# Allegro board BODY.brd
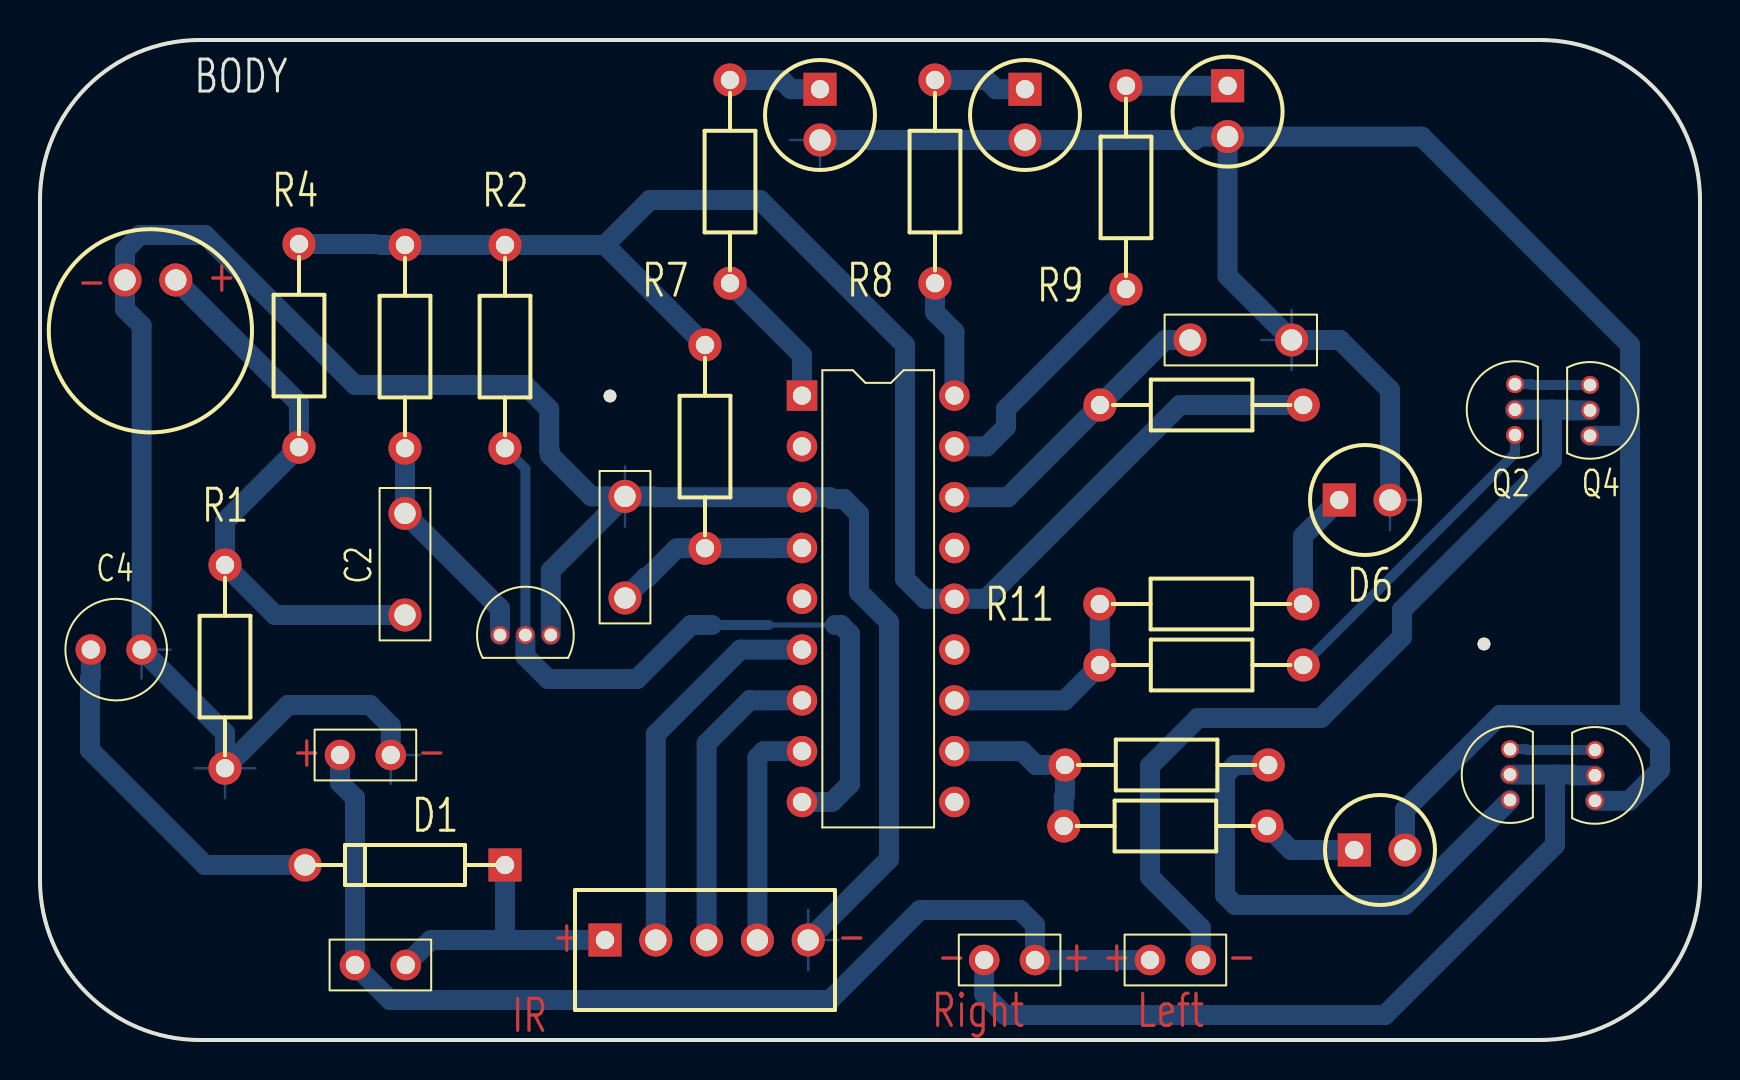
[diagram p0: board, top side]
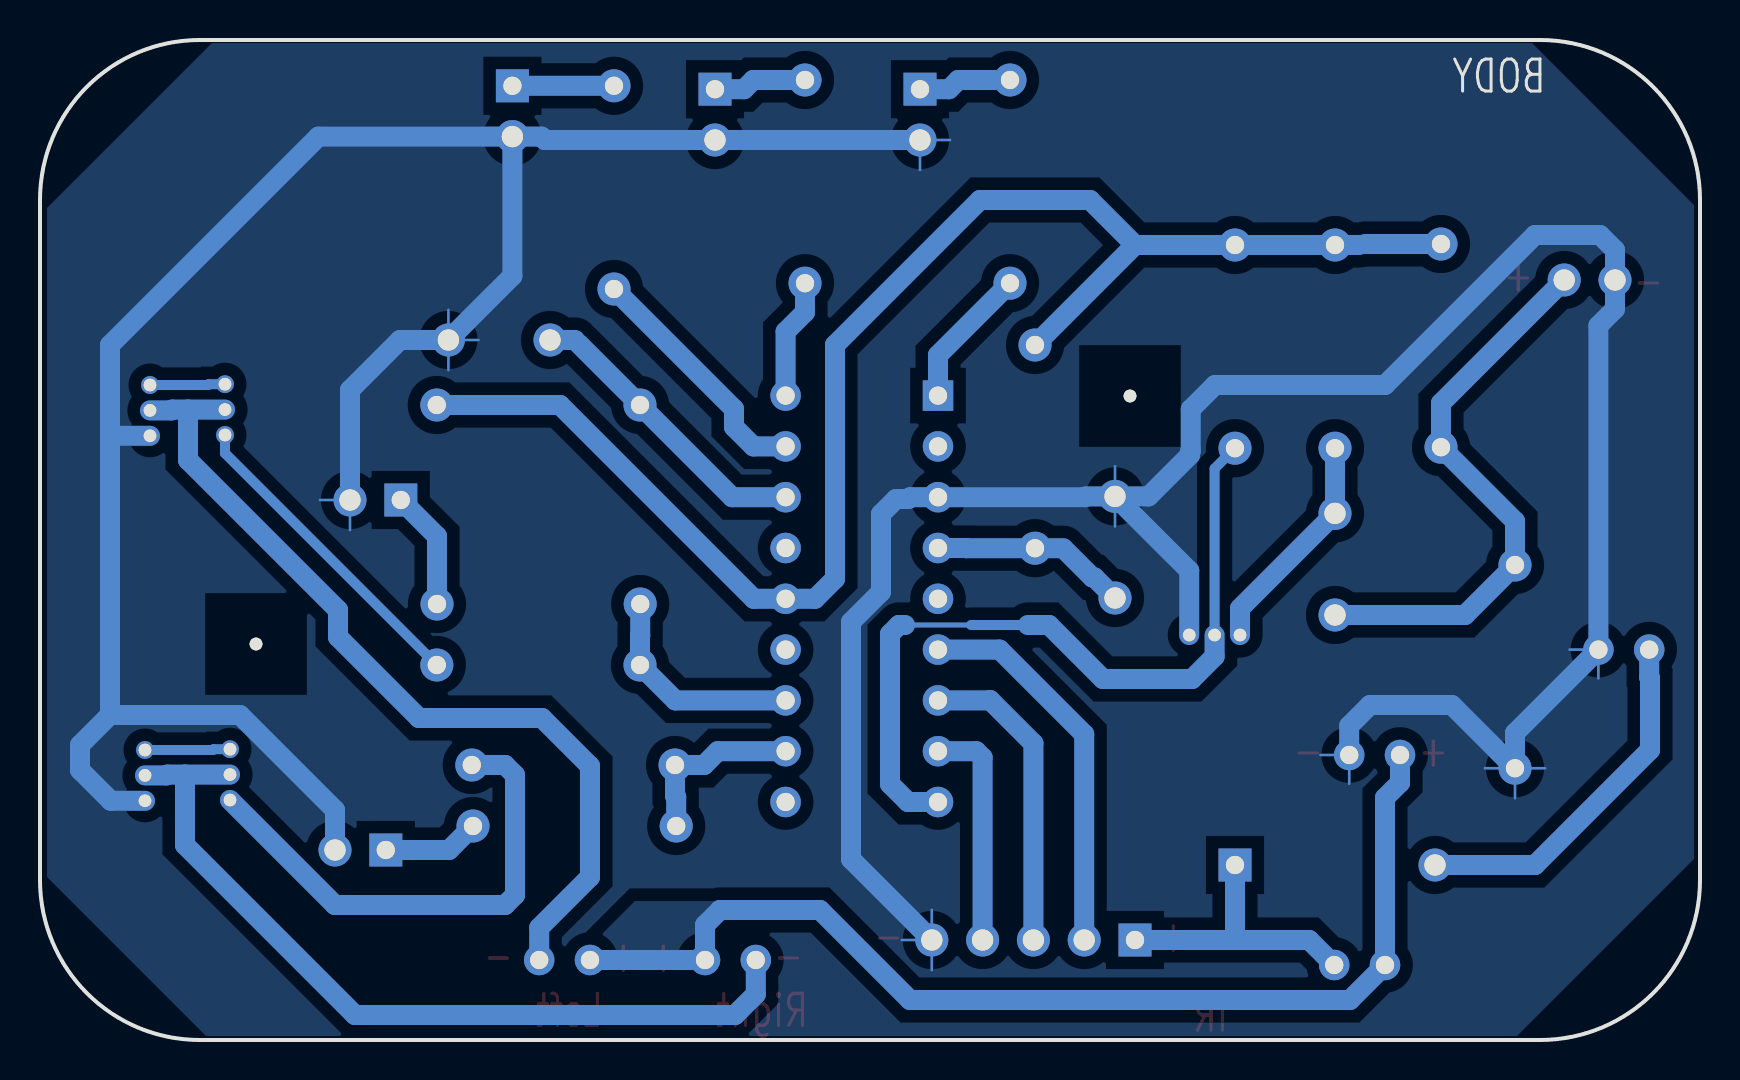
[diagram p1: board, bottom side, seen from below]

Outline 83 x 50 mm; copper layers: TOP, BOTTOM. Coordinates in mm from the lower left corner of the outline.
Outline path: 0,42 0,8 arc(2.34,2.34) 8,0 75,0 arc(80.66,2.34) 83,8 83,42 arc(80.66,47.66) 75,50 8,50 arc(2.34,47.66) 0,42

## Placement (name value [footprint] x y rotation side)
BATTERY  BATTERY  [JUMPER2]  15 14.25 0 top
C1  104  [CAPCK06]  29.25 22.1 0 top
C2  104  [CAPCK06]  18.25 21.25 0 top
C3  11pF  [CAPCK06]  57.5 35 270 top
C4  100uF  [CAP196]  2.54 19.52 270 top
D1  1N4004  [DIODE]  13.25 8.75 0 top
D2  RED  [LEDKA]  49.25 45 90 top
D3  RED  [LEDKA]  59.38 45.17 90 top
D4  RED  [LEDKA]  39 45 90 top
D5  GREEN  [LEDKA]  68.25 9.5 180 top
D6  GREEN  [LEDKA]  67.5 27 180 top
J1  5_pins_180_degrees  [HEADER_5]  28.25 5 0 top
J2  Right motor  [JUMPER2]  55.5 4 0 top
J3  Left motor  [JUMPER2]  49.75 4 180 top
MK1  -  [MICROPHONE]  4.25 38 0 top
NOREF  -  [unnamed]  28.5 32.2 0 top
NOREF#2  -  [unnamed]  72.2 19.8 0 top
Q1  C1815  [TO92]  23 20.25 90 top
Q2  C1815  [TO92]  73.75 30.25 180 top
Q3  C1815  [TO92]  73.5 12 180 top
Q4  8050  [TO92]  77.5 32.75 0 top
Q5  8050  [TO92]  77.75 14.5 0 top
R1  560R  [ODPOR]  9.25 23.75 270 top
R2  10k  [ODPOR]  23.25 39.75 270 top
R3  3.3M  [ODPOR]  18.25 39.75 270 top
R4  56k  [ODPOR]  12.95 39.8 270 top
R5  220R  [ODPOR]  53 18.75 0 top
R6  220R  [ODPOR]  51.25 13.75 0 top
R7  330R  [ODPOR]  34.5 48 270 top
R8  330R  [ODPOR]  44.75 48 270 top
R9  330R  [ODPOR]  54.3 47.71 270 top
R10  3.3k  [ODPOR]  53 31.75 0 top
R11  220R  [ODPOR]  63.15 21.8 180 top
R12  220R  [ODPOR]  61.35 10.7 180 top
R13  100k  [ODPOR]  33.25 34.75 270 top
SW  POWER SW  [JUMPER2]  15.75 3.75 0 top
U1  EM78P156EP  [DIP18_3]  38.1 32.22 0 top

## Library data of the parts
BATTERY = BATTERY
C1-C3 = C
C4 = CAP POL
D1 = DIODE
D2-D6 = LED
J1 = CONN PCB 5-R
J2 J3 = Motor
MK1 = MICROPHONE
Q1-Q5 = 1R1001
R1-R13 = R
SW = SW_PB_SPST
U1 = EM78P156EP_0

## Footprints (pads in the part's own frame, mm; a bottom-side part is the same pattern mirrored in y, then rotated)
CAP196
  round 1.524 hole 0.914: 1(0,0) 2(0,2.54)
CAPCK06
  round 1.651 hole 1.067: 1(0,0) 2(0,5.08)
DIODE
  round 1.651 hole 1.067: 1(0,0)
  rect 1.651x1.651 hole 0.914: 2(10,0)
DIP18_3
  rect 1.524x1.524 hole 0.914: 1(0,0)
  round 1.524 hole 0.914: 2(0,-2.54) 3(0,-5.08) 4(0,-7.62) 5(0,-10.16) 6(0,-12.7) 7(0,-15.24) 8(0,-17.78) 9(0,-20.32) 10(7.62,-20.32) 11(7.62,-17.78) 12(7.62,-15.24) 13(7.62,-12.7) 14(7.62,-10.16) 15(7.62,-7.62) 16(7.62,-5.08) 17(7.62,-2.54) 18(7.62,0)
HEADER_5
  rect 1.651x1.651 hole 0.914: 1(0,0)
  round 1.651 hole 1.067: 2(2.54,0) 3(5.08,0) 4(7.62,0) 5(10.16,0)
JUMPER2
  round 1.524 hole 0.914: 1(0,0) 2(2.54,0)
LEDKA
  round 1.651 hole 1.067: 1(0,0)
  rect 1.651x1.651 hole 0.914: 2(2.54,0)
MICROPHONE
  round 1.651 hole 1.067: 1(0,0) 2(2.54,0)
ODPOR
  round 1.651 hole 0.914: 1(0,0) 2(10.16,0)
TO92
  round 0.889 hole 0.635: 1(0,0) 2(0,-1.27) 3(0,-2.54)
unnamed
  round 0.635 hole 3.175 unplated: (0,0)

## Nets
GND: BATTERY.2(-) C1.2 C3.2 C4.2 D2.1(CATHODE) D3.1(CATHODE) D4.1(CATHODE) D5.1(CATHODE) D6.1(CATHODE) J1.5 MK1.1 Q1.3(E) Q4.3(E) Q5.3(E) R1.2 U1.3(TCC)
VCC: R2.1 R3.1 R4.1 R10.2 R13.1 U1.14(VCC)
N01126: C3.1 R10.1 U1.16(OSCI)
N01130: C1.1 R13.2 U1.4(R\E\S\E\T\)
N01134: D4.2(ANODE) R7.1
N01138: D2.2(ANODE) R8.1
N01142: D3.2(ANODE) R9.1
N01146: D1.2(A) J1.1 SW.2
N01150: BATTERY.1(+) J2.1(+) J3.1(+) SW.1
N01157: C4.1 D1.1(K)
N01166: C2.1 MK1.2 R1.1 R4.2
N01189: C2.2 Q1.1(B) R3.2
N01198: Q1.2(C) R2.2 U1.9(P63)
N01250: Q2.1(B) R5.2
N01254: D5.2(ANODE) R12.1
N01267: Q3.1(B) R6.2
N01271: Q3.3(E) Q5.1(B)
N01286: J3.2(-) Q3.2(C) Q5.2(C)
N01298: Q2.3(E) Q4.1(B)
N01305: J2.2(-) Q2.2(C) Q4.2(C)
N01562: R6.1 R12.2 U1.11(P65)
N01583: R5.1 R11.2 U1.12(P66)
N002050: D6.2(ANODE) R11.1
N06854: R9.2 U1.17(P50)
N06861: R8.2 U1.18(P51)
N06873: R7.2 U1.1(P52)
N06952: J1.2 U1.6(P60,I\N\T\)
N06956: J1.3 U1.7(P61)
N06960: J1.4 U1.8(P62)

Pads without a net: U1 2 5 10 13 15

## Routing (per net, layer and track width the routed paths; a pad name or vN(x,y) marks a point on that pad's centre or on a via; arc(x,y) is an arc through that point)
GND: length 254.8
  BOTTOM w0.127: 61.07,35 C3.2 ; C3.2 62.58,36.51 ; C3.2 62.58,33.49 ; 29.25,25.67 C1.2 29.25,28.69 ; 9.25,12.08 R1.2 ; R1.2 10.76,13.59 ; R1.2 7.74,13.59 ; 6.52,19.52 C4.2 5.08,18.08 ; 67.5,25.49 D6.1 69.01,27 ; 38.41,3.49 J1.5 ; J1.5 39.92,5 ; J1.5 38.41,6.51 ; 17.54,12.81 BATTERY.2 18.98,14.25 ; 37.49,45 D4.1 39,43.49
  BOTTOM w1: J1.5 42.45,9.04 42.45,20.9 40.95,22.4 40.95,26.3 40.2,27.05 39.58,27.05 39.49,27.14 U1.3 30.74,27.14 30.7,27.18 C1.2 ; Q1.3 25.54,23.47 C1.2 ; D3.1 69.08,45.17 79.5,34.75 79.5,30.25 ; D3.1 59.38,38.2 C3.2 65,35 67.5,32.5 D6.1 ; D3.1 57.93,45.17 57.76,45 D2.1 D4.1 ; 79.5,16.25 73,16.25 68.25,11.5 D5.1 ; 79.5,16.25 81,14.75 81,13.5 79.46,11.96 Q5.3 ; 79.5,16.25 79.5,30.25 ; 79.5,30.25 79.46,30.21 Q4.3 ; C1.2 27.57,27.18 25.5,29.25 25.5,29.41 25.46,29.45 25.46,31.54 24.25,32.75 15.75,32.75 8.25,40.25 5,40.25 4.25,39.5 MK1.1 4.25,36.55 5.08,35.72 C4.2 9.25,15.35 R1.2 12.41,16.75 16.5,16.75 17.54,15.71 BATTERY.2
VCC: length 77.4
  BOTTOM w0.5: 16.75,39.8 17,39.8 17.05,39.75
  BOTTOM w1: 17.05,39.75 R3.1 R2.1 28.25,39.75 ; 28.25,39.75 R13.1 ; 28.25,39.75 30.5,42 36,42 43.25,34.75 43.25,23.06 44.25,22.06 U1.14 47.31,22.06 57,31.75 R10.2 ; R4.1 16.75,39.8
N01126: length 15
  BOTTOM w0.5: 56.25,35 56.05,34.8
  BOTTOM w1: C3.1 56.25,35 ; U1.16 48.39,27.14 R10.1 56.05,34.8
N01130: length 9.9
  BOTTOM w0.5: 31.8,24.55 31.84,24.59
  BOTTOM w1: 31.8,24.55 30.38,23.13 30.28,23.13 C1.1 ; U1.4 36.71,24.6 36.7,24.59 R13.2 31.84,24.59
N01134: length 4.7
  BOTTOM w1: D4.2 37.55,47.54 37.09,48 R7.1
N01138: length 4.7
  BOTTOM w1: R8.1 47.34,48 47.8,47.54 D2.2
N01142: length 5.1
  BOTTOM w1: R9.1 D3.2
N01146: length 14.2
  BOTTOM w1: 23.25,5 19.54,5 SW.2 ; 23.25,5 J1.1 ; 23.25,5 D1.2
N01150: length 55.2
  BOTTOM w1: J2.1 J3.1 49.75,5.75 49,6.5 44,6.5 39.5,2 17.5,2 SW.1 15.75,12.11 15,12.86 BATTERY.1
N01157: length 18.2
  BOTTOM w1: C4.1 2.54,18.13 2.5,18.09 2.5,14.5 8.25,8.75 D1.1
N01166: length 28.4
  BOTTOM w1: C2.1 11.75,21.25 R1.1 9.25,25.94 R4.2 12.95,31.84 MK1.2
N01189: length 11.3
  BOTTOM w1: Q1.1 23,21.58 C2.2 R3.2
N01198: length 39.1
  BOTTOM w0.25: 36.45,20.75 39.75,20.75
  BOTTOM w0.5: Q1.2 24.27,28.57 R2.2 ; 33.6,20.75 36.45,20.75
  BOTTOM w1: 33.6,20.75 32.55,20.75 29.85,18.05 25.4,18.05 24.27,19.18 Q1.2 ; U1.9 39.6,11.9 40.5,12.8 40.5,20.3 40.05,20.75 39.75,20.75
N01250: length 15.9
  BOTTOM w0.5: R5.2 73.75,29.34 Q2.1
N01254: length 4.9
  BOTTOM w1: R12.1 62.55,9.5 D5.2
N01267: length 25
  BOTTOM w1: Q3.1 68.25,6.75 59.75,6.75 59.25,7.25 59.25,13.25 59.75,13.75 R6.2
N01271: length 4.3
  BOTTOM w0.5: Q3.3 74.32,14.54 74.36,14.5 Q5.1
N01286: length 42
  BOTTOM w1: J3.2 47.21,2.29 48.25,1.25 67.25,1.25 75.75,9.75 75.75,13.27 ; Q5.2 76.68,13.23 76.64,13.27 75.75,13.27 ; Q3.2 75.75,13.27
N01298: length 3.8
  BOTTOM w0.5: Q4.1 74.61,32.75 74.57,32.79 Q2.3
N01305: length 44.3
  BOTTOM w1: 75.6,31.52 76.39,31.52 76.43,31.48 Q4.2 ; 75.6,31.52 Q2.2 ; 75.6,31.52 75.6,29 68.1,21.5 68.1,20.15 64.05,16.1 57.9,16.1 55.5,13.7 55.5,8.15 58.04,5.61 J2.2
N01562: length 8.9
  BOTTOM w1: R12.2 51.19,12.15 51.25,12.21 R6.1 49.8,13.75 49.11,14.44 U1.11
N01583: length 11.1
  BOTTOM w1: R11.2 52.99,20.21 53,20.2 R5.1 51.23,16.98 U1.12
N002050: length 5.9
  BOTTOM w1: R11.1 63.15,25.19 D6.2
N06854: length 12.4
  BOTTOM w1: R9.2 48.3,31.55 48.3,30.65 47.33,29.68 U1.17
N06861: length 6
  BOTTOM w1: U1.18 45.72,35.42 44.75,36.39 R8.2
N06873: length 7.1
  BOTTOM w1: R7.2 38.1,34.24 U1.1
N06952: length 19.4
  BOTTOM w1: U1.6 35.02,19.52 30.79,15.29 J1.2
N06956: length 15.5
  BOTTOM w1: U1.7 35.52,16.98 35.5,17 33.33,14.83 J1.3
N06960: length 11.5
  BOTTOM w1: U1.8 36.19,14.44 35.87,14.12 J1.4

## Copper pours and planes (outline as drawn; the poured copper is in the pictures)
GND on BOTTOM: 8.4,49.85 74.4,49.85 82.65,41.6 82.65,8.15 74.7,0.2 9.15,0.2 0.3,9.05 0.3,41.75 ; 16 cut-outs
N01150 on BOTTOM: 55.5,3.95 55.5,4.7 53.25,6.95 48.9,6.95 48.6,6.65 49.5,5.75 49.8,5.75 49.8,4.1 49.95,3.95

## Text on the board
Board Geometry/Outline: BODY
TOP: - | + | IR | Right | Left
